# Altium PCB 十六路输出.PcbDoc (part 3 of 3)
Units mm, origin at the board's own origin, x right, y up, seen from the top; angles counter-clockwise.
Board outline 122.4 x 87.4 mm, 2 copper layers (Top Layer, Bottom Layer); 99 components, 112 nets, 383 pads, 41 vias.
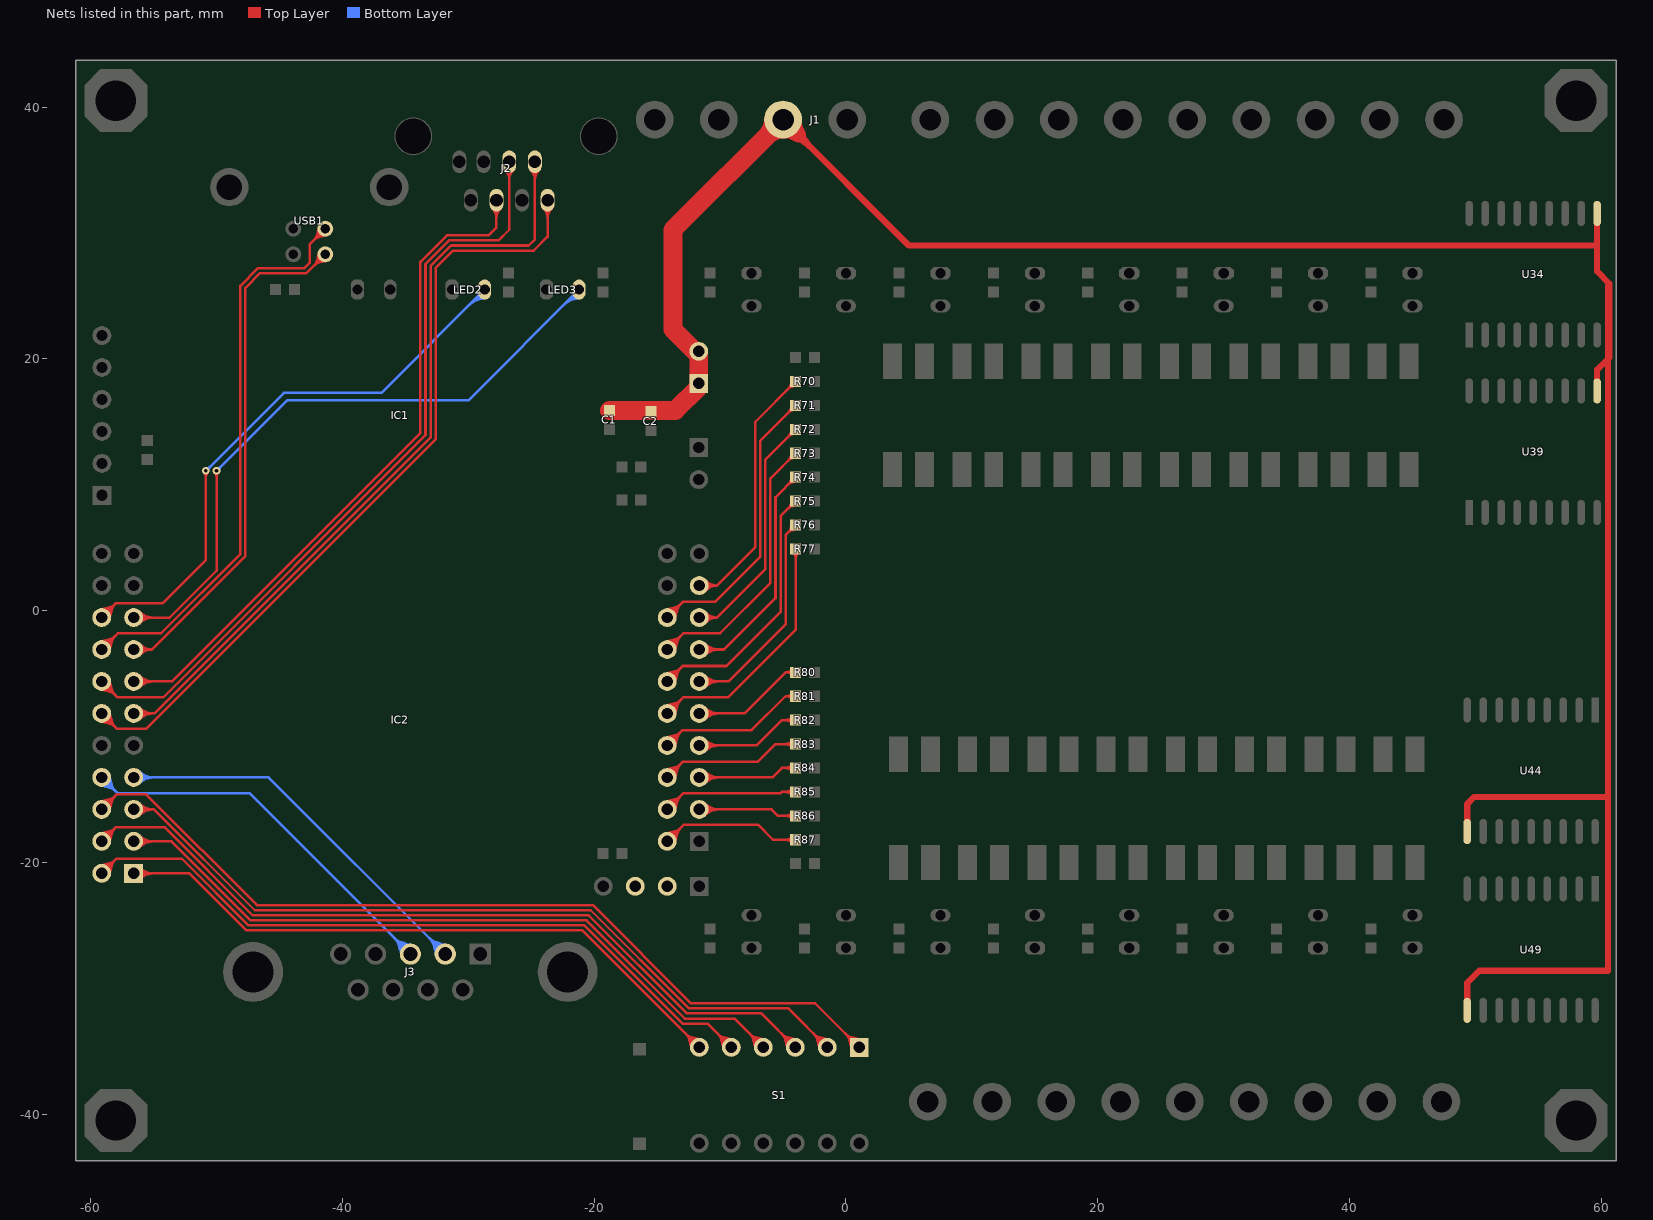
[diagram p3: the nets of this part, all layers, seen from the top]

## Via types
v1: diameter 0.6, hole 0.3, Top Layer to Bottom Layer, 41 vias

## Nets (pads, with @x,y where several pads share a name; then routed paths per layer and width w, separated by ;. In a path a pad name is that pad's centre, name@x,y a point inside that pad or via, vN(x,y) a via of type N, cw(c..) or ccw(c..) an arc to the next point about the centre after c; other vN are vias at no path point) (continued)
PA4: IC2.26 R70.1 | length 31
  Top Layer w0.2: IC2.26@-11.66,1.99 -10.251,1.99 ; R70.1@-4.43,17.865 cw(c-3.903,17.724) R70.1@-4.012,18.259 ; R70.1@-4.335,17.77 ccw(c-4.476,18.297) R70.1@-3.941,18.188 ; R70.1@-4,18.2 -7.2,15 -7.2,5.041 -10.251,1.99 ; -10.685,1.99 cw(c-10.685,2.822) -11.318,2.282 ccw(c-10.685,2.822) -10.685,1.99 ; -10.685,1.99 ccw(c-10.685,1.158) -11.318,1.698 cw(c-10.685,1.158) -10.685,1.99 ; -10.251,1.99 cw(c-10.251,3.191) -11.165,2.412 ccw(c-10.251,3.191) -10.251,1.99 ; -10.251,1.99 ccw(c-10.251,0.789) -11.165,1.568 cw(c-10.251,0.789) -10.251,1.99 ; -4.58,17.62 cw(c-4,17.039) -4,17.86 ccw(c-4,17.039) -4.58,17.62 ; -4.58,17.62 ccw(c-5.161,18.2) -4.34,18.2 cw(c-5.161,18.2) -4.58,17.62
PA5: IC2.27 R71.1 | length 40.4
  Top Layer w0.2: IC2.27@-14.543,-0.48 cw(c-13.707,-0.651) -13.928,0.173 ; IC2.27@-14.347,-0.52 cw(c-13.353,-0.723) -13.616,0.257 ; IC2.27@-14.201,-0.5 ccw(c-14.208,0.114) -13.615,-0.045 ; IC2.27@-14.2,-0.55 -12.95,0.7 -10.4,0.7 -6.8,4.3 -6.8,13.5 R71.1@-4,16.3 ; IC2.27@-14.17,-0.697 ccw(c-14.373,0.297) -13.393,0.034 ; IC2.27@-14.15,-0.551 cw(c-13.536,-0.558) -13.695,0.035 ; IC2.27@-14.13,-0.893 ccw(c-14.301,-0.057) -13.477,-0.278 ; R71.1@-4.43,15.965 cw(c-3.903,15.824) R71.1@-4.012,16.359 ; R71.1@-4.335,15.87 ccw(c-4.476,16.397) R71.1@-3.941,16.288 ; -13.432,0.218 cw(c-14.2,0.986) -14.2,-0.1 ccw(c-14.2,0.986) -13.432,0.218 ; -13.432,0.218 ccw(c-12.664,-0.55) -13.75,-0.55 cw(c-12.664,-0.55) -13.432,0.218 ; -13.09,0.56 cw(c-14.2,1.669) -14.2,0.1 ccw(c-14.2,1.669) -13.09,0.56 ; -13.09,0.56 ccw(c-11.981,-0.55) -13.55,-0.55 cw(c-11.981,-0.55) -13.09,0.56 ; -4.58,15.72 cw(c-4,15.139) -4,15.96 ccw(c-4,15.139) -4.58,15.72 ; -4.58,15.72 ccw(c-5.161,16.3) -4.34,16.3 cw(c-5.161,16.3) -4.58,15.72
PA6: IC2.28 R72.1 | length 29.8
  Top Layer w0.2: IC2.28@-11.66,-0.55 -10.25,-0.55 ; R72.1@-4.43,14.065 cw(c-3.903,13.924) R72.1@-4.012,14.459 ; R72.1@-4.335,13.97 ccw(c-4.476,14.497) R72.1@-3.941,14.388 ; R72.1@-4,14.4 -6.4,12 -6.4,3.3 -10.25,-0.55 ; -10.684,-0.55 cw(c-10.684,0.284) -11.318,-0.258 ccw(c-10.684,0.284) -10.684,-0.55 ; -10.684,-0.55 ccw(c-10.684,-1.384) -11.318,-0.842 cw(c-10.684,-1.384) -10.684,-0.55 ; -10.25,-0.55 cw(c-10.25,0.654) -11.166,-0.128 ccw(c-10.25,0.654) -10.25,-0.55 ; -10.25,-0.55 ccw(c-10.25,-1.754) -11.166,-0.972 cw(c-10.25,-1.754) -10.25,-0.55 ; -4.58,13.82 cw(c-4,13.239) -4,14.06 ccw(c-4,13.239) -4.58,13.82 ; -4.58,13.82 ccw(c-5.161,14.4) -4.34,14.4 cw(c-5.161,14.4) -4.58,13.82
PA7: IC2.29 R73.1 | length 39.4
  Top Layer w0.2: IC2.29@-14.543,-3.02 cw(c-13.707,-3.191) -13.928,-2.367 ; IC2.29@-14.347,-3.06 cw(c-13.353,-3.263) -13.616,-2.283 ; IC2.29@-14.201,-3.04 ccw(c-14.208,-2.426) -13.615,-2.585 ; IC2.29@-14.2,-3.09 -12.91,-1.8 -10,-1.8 -6,2.2 -6,10.5 R73.1@-4,12.5 ; IC2.29@-14.17,-3.237 ccw(c-14.373,-2.243) -13.393,-2.506 ; IC2.29@-14.15,-3.091 cw(c-13.536,-3.098) -13.695,-2.505 ; IC2.29@-14.13,-3.433 ccw(c-14.301,-2.597) -13.477,-2.818 ; R73.1@-4.43,12.165 cw(c-3.903,12.024) R73.1@-4.012,12.559 ; R73.1@-4.335,12.07 ccw(c-4.476,12.597) R73.1@-3.941,12.488 ; -13.432,-2.322 cw(c-14.2,-1.554) -14.2,-2.64 ccw(c-14.2,-1.554) -13.432,-2.322 ; -13.432,-2.322 ccw(c-12.664,-3.09) -13.75,-3.09 cw(c-12.664,-3.09) -13.432,-2.322 ; -13.09,-1.98 cw(c-14.2,-0.871) -14.2,-2.44 ccw(c-14.2,-0.871) -13.09,-1.98 ; -13.09,-1.98 ccw(c-11.981,-3.09) -13.55,-3.09 cw(c-11.981,-3.09) -13.09,-1.98 ; -4.58,11.92 cw(c-4,11.339) -4,12.16 ccw(c-4,11.339) -4.58,11.92 ; -4.58,11.92 ccw(c-5.161,12.5) -4.34,12.5 cw(c-5.161,12.5) -4.58,11.92
PA8: IC2.41 R87.1 | length 27.9
  Top Layer w0.2: IC2.41@-14.543,-18.26 cw(c-13.707,-18.431) -13.928,-17.607 ; IC2.41@-14.347,-18.3 cw(c-13.353,-18.503) -13.616,-17.523 ; IC2.41@-14.201,-18.28 ccw(c-14.208,-17.666) -13.615,-17.825 ; IC2.41@-14.2,-18.33 -12.87,-17 -7,-17 -5.8,-18.2 R87.1@-4,-18.2 ; IC2.41@-14.17,-18.477 ccw(c-14.373,-17.483) -13.393,-17.746 ; IC2.41@-14.15,-18.331 cw(c-13.536,-18.338) -13.695,-17.745 ; IC2.41@-14.13,-18.673 ccw(c-14.301,-17.837) -13.477,-18.058 ; -13.432,-17.562 cw(c-14.2,-16.794) -14.2,-17.88 ccw(c-14.2,-16.794) -13.432,-17.562 ; -13.432,-17.562 ccw(c-12.664,-18.33) -13.75,-18.33 cw(c-12.664,-18.33) -13.432,-17.562 ; -13.09,-17.22 cw(c-14.2,-16.111) -14.2,-17.68 ccw(c-14.2,-16.111) -13.09,-17.22 ; -13.09,-17.22 ccw(c-11.981,-18.33) -13.55,-18.33 cw(c-11.981,-18.33) -13.09,-17.22 ; -4.821,-18.2 cw(c-4.821,-19.021) -4.24,-18.44 ccw(c-4.821,-19.021) -4.821,-18.2 ; -4.821,-18.2 ccw(c-4.821,-17.379) -4.24,-17.96 cw(c-4.821,-17.379) -4.821,-18.2
PA13: IC2.14 J2.4 | length 81
  Top Layer w0.2: IC2.14@-59.463,-5.7 ccw(c-58.627,-5.529) -58.848,-6.353 ; IC2.14@-59.267,-5.66 ccw(c-58.273,-5.457) -58.536,-6.437 ; IC2.14@-59.121,-5.68 cw(c-59.128,-6.294) -58.535,-6.135 ; IC2.14@-59.12,-5.63 -57.85,-6.9 -54.231,-6.9 -33.4,13.931 -33.4,27.531 -31.531,29.4 -27.6,29.4 -26.748,30.252 J2.4@-26.748,35.648 ; IC2.14@-59.09,-5.483 cw(c-59.293,-6.477) -58.313,-6.214 ; IC2.14@-59.07,-5.629 ccw(c-58.456,-5.622) -58.615,-6.215 ; IC2.14@-59.05,-5.287 cw(c-59.221,-6.123) -58.397,-5.902 ; -58.352,-6.398 cw(c-57.584,-5.63) -58.67,-5.63 ccw(c-57.584,-5.63) -58.352,-6.398 ; -58.352,-6.398 ccw(c-59.12,-7.166) -59.12,-6.08 cw(c-59.12,-7.166) -58.352,-6.398 ; -58.01,-6.74 cw(c-56.901,-5.63) -58.47,-5.63 ccw(c-56.901,-5.63) -58.01,-6.74 ; -58.01,-6.74 ccw(c-59.12,-7.849) -59.12,-6.28 cw(c-59.12,-7.849) -58.01,-6.74 ; -26.748,34.212 cw(c-25.662,34.212) -26.43,34.98 ccw(c-25.662,34.212) -26.748,34.212 ; -26.748,34.212 ccw(c-27.834,34.212) -27.066,34.98 cw(c-27.834,34.212) -26.748,34.212 ; -26.748,34.694 cw(c-26.144,34.694) -26.571,35.121 ccw(c-26.144,34.694) -26.748,34.694 ; -26.748,34.694 ccw(c-27.352,34.694) -26.925,35.121 cw(c-27.352,34.694) -26.748,34.694
PA14: IC2.13 J2.5 | length 67.5
  Top Layer w0.2: IC2.13@-56.58,-5.63 -53.527,-5.63 -33.8,14.097 -33.8,27.697 -31.697,29.8 -28.4,29.8 -27.764,30.436 J2.5@-27.764,32.6 ; -55.494,-5.63 cw(c-55.494,-4.544) -56.262,-5.312 ccw(c-55.494,-4.544) -55.494,-5.63 ; -55.494,-5.63 ccw(c-55.494,-6.716) -56.262,-5.948 cw(c-55.494,-6.716) -55.494,-5.63 ; -55.011,-5.63 cw(c-55.011,-4.061) -56.12,-5.17 ccw(c-55.011,-4.061) -55.011,-5.63 ; -55.011,-5.63 ccw(c-55.011,-7.199) -56.12,-6.09 cw(c-55.011,-7.199) -55.011,-5.63 ; -27.764,31.164 cw(c-26.678,31.164) -27.446,31.932 ccw(c-26.678,31.164) -27.764,31.164 ; -27.764,31.164 ccw(c-28.85,31.164) -28.082,31.932 cw(c-28.85,31.164) -27.764,31.164 ; -27.764,31.646 cw(c-27.16,31.646) -27.587,32.073 ccw(c-27.16,31.646) -27.764,31.646 ; -27.764,31.646 ccw(c-28.368,31.646) -27.941,32.073 cw(c-28.368,31.646) -27.764,31.646
PB0: IC2.32 R76.1 | length 29.1
  Top Layer w0.2: IC2.32@-11.66,-5.63 -9.33,-5.63 -4.8,-1.1 -4.8,6 R76.1@-4,6.8 ; R76.1@-4.43,6.465 cw(c-3.903,6.324) R76.1@-4.012,6.859 ; R76.1@-4.335,6.37 ccw(c-4.476,6.897) R76.1@-3.941,6.788 ; -10.574,-5.63 cw(c-10.574,-4.544) -11.342,-5.312 ccw(c-10.574,-4.544) -10.574,-5.63 ; -10.574,-5.63 ccw(c-10.574,-6.716) -11.342,-5.948 cw(c-10.574,-6.716) -10.574,-5.63 ; -10.091,-5.63 cw(c-10.091,-4.061) -11.2,-5.17 ccw(c-10.091,-4.061) -10.091,-5.63 ; -10.091,-5.63 ccw(c-10.091,-7.199) -11.2,-6.09 cw(c-10.091,-7.199) -10.091,-5.63 ; -4.58,6.22 cw(c-4,5.639) -4,6.46 ccw(c-4,5.639) -4.58,6.22 ; -4.58,6.22 ccw(c-5.161,6.8) -4.34,6.8 cw(c-5.161,6.8) -4.58,6.22
PB1: IC2.33 R77.1 | length 36
  Top Layer w0.2: IC2.33@-14.543,-8.1 cw(c-13.707,-8.271) -13.928,-7.447 ; IC2.33@-14.347,-8.14 cw(c-13.353,-8.343) -13.616,-7.363 ; IC2.33@-14.201,-8.12 ccw(c-14.208,-7.506) -13.615,-7.665 ; IC2.33@-14.2,-8.17 -12.93,-6.9 -9.366,-6.9 -4,-1.534 R77.1@-4,4.9 ; IC2.33@-14.17,-8.317 ccw(c-14.373,-7.323) -13.393,-7.586 ; IC2.33@-14.15,-8.171 cw(c-13.536,-8.178) -13.695,-7.585 ; IC2.33@-14.13,-8.513 ccw(c-14.301,-7.677) -13.477,-7.898 ; -13.432,-7.402 cw(c-14.2,-6.634) -14.2,-7.72 ccw(c-14.2,-6.634) -13.432,-7.402 ; -13.432,-7.402 ccw(c-12.664,-8.17) -13.75,-8.17 cw(c-12.664,-8.17) -13.432,-7.402 ; -13.09,-7.06 cw(c-14.2,-5.951) -14.2,-7.52 ccw(c-14.2,-5.951) -13.09,-7.06 ; -13.09,-7.06 ccw(c-11.981,-8.17) -13.55,-8.17 cw(c-11.981,-8.17) -13.09,-7.06 ; -4,4.079 cw(c-3.179,4.079) -3.76,4.66 ccw(c-3.179,4.079) -4,4.079 ; -4,4.079 ccw(c-4.821,4.079) -4.24,4.66 cw(c-4.821,4.079) -4,4.079
PB8: IC2.6 S1.1 | length 95.5
  Top Layer w0.2: IC2.6@-59.463,-15.72 cw(c-58.627,-15.891) -58.848,-15.067 ; IC2.6@-59.267,-15.76 cw(c-58.273,-15.963) -58.536,-14.983 ; IC2.6@-59.121,-15.74 ccw(c-59.128,-15.126) -58.535,-15.285 ; IC2.6@-59.12,-15.79 -57.93,-14.6 -55.6,-14.6 -46.8,-23.4 -20.112,-23.4 -12.312,-31.2 -2.44,-31.2 S1.1@1.05,-34.69 ; IC2.6@-59.09,-15.937 ccw(c-59.293,-14.943) -58.313,-15.206 ; IC2.6@-59.07,-15.791 cw(c-58.456,-15.798) -58.615,-15.205 ; IC2.6@-59.05,-16.133 ccw(c-59.221,-15.297) -58.397,-15.518 ; 0.243,-34.106 ccw(c1.223,-33.843) S1.1@1.02,-34.837 ; S1.1@0.327,-34.418 ccw(c1.151,-34.197) S1.1@0.98,-35.033 ; 0.466,-33.883 cw(c0.203,-34.863) S1.1@1.197,-34.66 ; S1.1@0.778,-33.967 cw(c0.557,-34.791) S1.1@1.393,-34.62 ; -58.352,-15.022 cw(c-59.12,-14.254) -59.12,-15.34 ccw(c-59.12,-14.254) -58.352,-15.022 ; -58.352,-15.022 ccw(c-57.584,-15.79) -58.67,-15.79 cw(c-57.584,-15.79) -58.352,-15.022 ; -58.01,-14.68 cw(c-59.12,-13.571) -59.12,-15.14 ccw(c-59.12,-13.571) -58.01,-14.68 ; -58.01,-14.68 ccw(c-56.901,-15.79) -58.47,-15.79 cw(c-56.901,-15.79) -58.01,-14.68 ; -0.06,-33.58 cw(c-1.169,-34.69) 0.4,-34.69 ccw(c-1.169,-34.69) -0.06,-33.58 ; -0.06,-33.58 ccw(c1.05,-32.471) 1.05,-34.04 cw(c1.05,-32.471) -0.06,-33.58 ; 0.282,-33.922 cw(c-0.486,-34.69) 0.6,-34.69 ccw(c-0.486,-34.69) 0.282,-33.922 ; 0.282,-33.922 ccw(c1.05,-33.154) 1.05,-34.24 cw(c1.05,-33.154) 0.282,-33.922
PB13: IC2.34 R80.1 | length 19.8
  Top Layer w0.2: IC2.34@-11.66,-8.17 -8.07,-8.17 -4.8,-4.9 ; R80.1@-4,-4.9 -4.8,-4.9 ; -10.574,-8.17 cw(c-10.574,-7.084) -11.342,-7.852 ccw(c-10.574,-7.084) -10.574,-8.17 ; -10.574,-8.17 ccw(c-10.574,-9.256) -11.342,-8.488 cw(c-10.574,-9.256) -10.574,-8.17 ; -10.091,-8.17 cw(c-10.091,-6.601) -11.2,-7.71 ccw(c-10.091,-6.601) -10.091,-8.17 ; -10.091,-8.17 ccw(c-10.091,-9.739) -11.2,-8.63 cw(c-10.091,-9.739) -10.091,-8.17 ; -4.8,-4.9 cw(c-4.8,-5.671) -4.245,-5.136 ccw(c-4.8,-5.671) -4.8,-4.9 ; -4.8,-4.9 ccw(c-4.8,-4.129) -4.245,-4.664 cw(c-4.8,-4.129) -4.8,-4.9
PB14: IC2.35 R81.1 | length 28.4
  Top Layer w0.2: IC2.35@-14.543,-10.64 cw(c-13.707,-10.811) -13.928,-9.987 ; IC2.35@-14.347,-10.68 cw(c-13.353,-10.883) -13.616,-9.903 ; IC2.35@-14.201,-10.66 ccw(c-14.208,-10.046) -13.615,-10.205 ; IC2.35@-14.2,-10.71 -12.99,-9.5 -7.5,-9.5 -4.8,-6.8 ; IC2.35@-14.17,-10.857 ccw(c-14.373,-9.863) -13.393,-10.126 ; IC2.35@-14.15,-10.711 cw(c-13.536,-10.718) -13.695,-10.125 ; IC2.35@-14.13,-11.053 ccw(c-14.301,-10.217) -13.477,-10.438 ; R81.1@-4,-6.8 -4.8,-6.8 ; -13.432,-9.942 cw(c-14.2,-9.174) -14.2,-10.26 ccw(c-14.2,-9.174) -13.432,-9.942 ; -13.432,-9.942 ccw(c-12.664,-10.71) -13.75,-10.71 cw(c-12.664,-10.71) -13.432,-9.942 ; -13.09,-9.6 cw(c-14.2,-8.491) -14.2,-10.06 ccw(c-14.2,-8.491) -13.09,-9.6 ; -13.09,-9.6 ccw(c-11.981,-10.71) -13.55,-10.71 cw(c-11.981,-10.71) -13.09,-9.6 ; -4.8,-6.8 cw(c-4.8,-7.571) -4.245,-7.036 ccw(c-4.8,-7.571) -4.8,-6.8 ; -4.8,-6.8 ccw(c-4.8,-6.029) -4.245,-6.564 cw(c-4.8,-6.029) -4.8,-6.8
PB15: IC2.36 R82.1 | length 19.4
  Top Layer w0.2: IC2.36@-11.66,-10.71 -7.11,-10.71 -5.1,-8.7 R82.1@-4,-8.7 ; -10.574,-10.71 cw(c-10.574,-9.624) -11.342,-10.392 ccw(c-10.574,-9.624) -10.574,-10.71 ; -10.574,-10.71 ccw(c-10.574,-11.796) -11.342,-11.028 cw(c-10.574,-11.796) -10.574,-10.71 ; -10.091,-10.71 cw(c-10.091,-9.141) -11.2,-10.25 ccw(c-10.091,-9.141) -10.091,-10.71 ; -10.091,-10.71 ccw(c-10.091,-12.279) -11.2,-11.17 cw(c-10.091,-12.279) -10.091,-10.71 ; -4.821,-8.7 cw(c-4.821,-9.521) -4.24,-8.94 ccw(c-4.821,-9.521) -4.821,-8.7 ; -4.821,-8.7 ccw(c-4.821,-7.879) -4.24,-8.46 cw(c-4.821,-7.879) -4.821,-8.7
PC0: IC2.1 S1.6 | length 73.1
  Top Layer w0.2: IC2.1@-56.58,-20.87 -52.158,-20.87 -47.628,-25.4 -20.94,-25.4 S1.6@-11.65,-34.69 ; -12.457,-34.106 ccw(c-11.477,-33.843) S1.6@-11.68,-34.837 ; -12.373,-34.418 ccw(c-11.549,-34.197) S1.6@-11.72,-35.033 ; -12.235,-34.185 ccw(c-11.642,-34.026) S1.6@-11.649,-34.64 ; -12.234,-33.883 cw(c-12.497,-34.863) S1.6@-11.503,-34.66 ; -12.155,-34.105 cw(c-12.314,-34.698) S1.6@-11.7,-34.691 ; -11.922,-33.967 cw(c-12.143,-34.791) S1.6@-11.307,-34.62 ; -55.494,-20.87 cw(c-55.494,-19.784) -56.262,-20.552 ccw(c-55.494,-19.784) -55.494,-20.87 ; -55.494,-20.87 ccw(c-55.494,-21.956) -56.262,-21.188 cw(c-55.494,-21.956) -55.494,-20.87 ; -55.011,-20.87 cw(c-55.011,-19.301) -56.12,-20.41 ccw(c-55.011,-19.301) -55.011,-20.87 ; -55.011,-20.87 ccw(c-55.011,-22.439) -56.12,-21.33 cw(c-55.011,-22.439) -55.011,-20.87 ; -12.76,-33.58 cw(c-13.869,-34.69) -12.3,-34.69 ccw(c-13.869,-34.69) -12.76,-33.58 ; -12.76,-33.58 ccw(c-11.65,-32.471) -11.65,-34.04 cw(c-11.65,-32.471) -12.76,-33.58 ; -12.418,-33.922 cw(c-13.186,-34.69) -12.1,-34.69 ccw(c-13.186,-34.69) -12.418,-33.922 ; -12.418,-33.922 ccw(c-11.65,-33.154) -11.65,-34.24 cw(c-11.65,-33.154) -12.418,-33.922
PC1: IC2.2 S1.5 | length 84.8
  Top Layer w0.2: IC2.2@-59.463,-20.8 cw(c-58.627,-20.971) -58.848,-20.147 ; IC2.2@-59.267,-20.84 cw(c-58.273,-21.043) -58.536,-20.063 ; IC2.2@-59.121,-20.82 ccw(c-59.128,-20.206) -58.535,-20.365 ; IC2.2@-59.12,-20.87 -57.95,-19.7 -52.763,-19.7 -47.463,-25 -20.774,-25 -12.974,-32.8 -11,-32.8 S1.5@-9.11,-34.69 ; IC2.2@-59.09,-21.017 ccw(c-59.293,-20.023) -58.313,-20.286 ; IC2.2@-59.07,-20.871 cw(c-58.456,-20.878) -58.615,-20.285 ; IC2.2@-59.05,-21.213 ccw(c-59.221,-20.377) -58.397,-20.598 ; -9.917,-34.106 ccw(c-8.937,-33.843) S1.5@-9.14,-34.837 ; -9.833,-34.418 ccw(c-9.009,-34.197) S1.5@-9.18,-35.033 ; -9.695,-34.185 ccw(c-9.102,-34.026) S1.5@-9.109,-34.64 ; -9.694,-33.883 cw(c-9.957,-34.863) S1.5@-8.963,-34.66 ; -9.615,-34.105 cw(c-9.774,-34.698) S1.5@-9.16,-34.691 ; -9.382,-33.967 cw(c-9.603,-34.791) S1.5@-8.767,-34.62 ; -58.352,-20.102 cw(c-59.12,-19.334) -59.12,-20.42 ccw(c-59.12,-19.334) -58.352,-20.102 ; -58.352,-20.102 ccw(c-57.584,-20.87) -58.67,-20.87 cw(c-57.584,-20.87) -58.352,-20.102 ; -58.01,-19.76 cw(c-59.12,-18.651) -59.12,-20.22 ccw(c-59.12,-18.651) -58.01,-19.76 ; -58.01,-19.76 ccw(c-56.901,-20.87) -58.47,-20.87 cw(c-56.901,-20.87) -58.01,-19.76 ; -10.22,-33.58 cw(c-11.329,-34.69) -9.76,-34.69 ccw(c-11.329,-34.69) -10.22,-33.58 ; -10.22,-33.58 ccw(c-9.11,-32.471) -9.11,-34.04 cw(c-9.11,-32.471) -10.22,-33.58 ; -9.878,-33.922 cw(c-10.646,-34.69) -9.56,-34.69 ccw(c-10.646,-34.69) -9.878,-33.922 ; -9.878,-33.922 ccw(c-9.11,-33.154) -9.11,-34.24 cw(c-9.11,-33.154) -9.878,-33.922
PC2: IC2.3 S1.4 | length 79.2
  Top Layer w0.2: IC2.3@-56.58,-18.33 -53.567,-18.33 -47.297,-24.6 -20.609,-24.6 -12.809,-32.4 -8.86,-32.4 S1.4@-6.57,-34.69 ; -7.377,-34.106 ccw(c-6.397,-33.843) S1.4@-6.6,-34.837 ; -7.293,-34.418 ccw(c-6.469,-34.197) S1.4@-6.64,-35.033 ; -7.155,-34.185 ccw(c-6.562,-34.026) S1.4@-6.569,-34.64 ; -7.154,-33.883 cw(c-7.417,-34.863) S1.4@-6.423,-34.66 ; -7.075,-34.105 cw(c-7.234,-34.698) S1.4@-6.62,-34.691 ; -6.842,-33.967 cw(c-7.063,-34.791) S1.4@-6.227,-34.62 ; -55.494,-18.33 cw(c-55.494,-17.244) -56.262,-18.012 ccw(c-55.494,-17.244) -55.494,-18.33 ; -55.494,-18.33 ccw(c-55.494,-19.416) -56.262,-18.648 cw(c-55.494,-19.416) -55.494,-18.33 ; -55.011,-18.33 cw(c-55.011,-16.761) -56.12,-17.87 ccw(c-55.011,-16.761) -55.011,-18.33 ; -55.011,-18.33 ccw(c-55.011,-19.899) -56.12,-18.79 cw(c-55.011,-19.899) -55.011,-18.33 ; -7.68,-33.58 cw(c-8.789,-34.69) -7.22,-34.69 ccw(c-8.789,-34.69) -7.68,-33.58 ; -7.68,-33.58 ccw(c-6.57,-32.471) -6.57,-34.04 cw(c-6.57,-32.471) -7.68,-33.58 ; -7.338,-33.922 cw(c-8.106,-34.69) -7.02,-34.69 ccw(c-8.106,-34.69) -7.338,-33.922 ; -7.338,-33.922 ccw(c-6.57,-33.154) -6.57,-34.24 cw(c-6.57,-33.154) -7.338,-33.922
PC3: IC2.4 S1.3 | length 90.9
  Top Layer w0.2: IC2.4@-59.463,-18.26 cw(c-58.627,-18.431) -58.848,-17.607 ; IC2.4@-59.267,-18.3 cw(c-58.273,-18.503) -58.536,-17.523 ; IC2.4@-59.121,-18.28 ccw(c-59.128,-17.666) -58.535,-17.825 ; IC2.4@-59.12,-18.33 -57.99,-17.2 -54.131,-17.2 -47.131,-24.2 -20.443,-24.2 -12.643,-32 -6.72,-32 S1.3@-4.03,-34.69 ; IC2.4@-59.09,-18.477 ccw(c-59.293,-17.483) -58.313,-17.746 ; IC2.4@-59.07,-18.331 cw(c-58.456,-18.338) -58.615,-17.745 ; IC2.4@-59.05,-18.673 ccw(c-59.221,-17.837) -58.397,-18.058 ; -4.837,-34.106 ccw(c-3.857,-33.843) S1.3@-4.06,-34.837 ; -4.753,-34.418 ccw(c-3.929,-34.197) S1.3@-4.1,-35.033 ; -4.615,-34.185 ccw(c-4.022,-34.026) S1.3@-4.029,-34.64 ; -4.614,-33.883 cw(c-4.877,-34.863) S1.3@-3.883,-34.66 ; -4.535,-34.105 cw(c-4.694,-34.698) S1.3@-4.08,-34.691 ; -4.302,-33.967 cw(c-4.523,-34.791) S1.3@-3.687,-34.62 ; -58.352,-17.562 cw(c-59.12,-16.794) -59.12,-17.88 ccw(c-59.12,-16.794) -58.352,-17.562 ; -58.352,-17.562 ccw(c-57.584,-18.33) -58.67,-18.33 cw(c-57.584,-18.33) -58.352,-17.562 ; -58.01,-17.22 cw(c-59.12,-16.111) -59.12,-17.68 ccw(c-59.12,-16.111) -58.01,-17.22 ; -58.01,-17.22 ccw(c-56.901,-18.33) -58.47,-18.33 cw(c-56.901,-18.33) -58.01,-17.22 ; -5.14,-33.58 cw(c-6.249,-34.69) -4.68,-34.69 ccw(c-6.249,-34.69) -5.14,-33.58 ; -5.14,-33.58 ccw(c-4.03,-32.471) -4.03,-34.04 cw(c-4.03,-32.471) -5.14,-33.58 ; -4.798,-33.922 cw(c-5.566,-34.69) -4.48,-34.69 ccw(c-5.566,-34.69) -4.798,-33.922 ; -4.798,-33.922 ccw(c-4.03,-33.154) -4.03,-34.24 cw(c-4.03,-33.154) -4.798,-33.922
PC4: IC2.30 R74.1 | length 30.1
  Top Layer w0.2: IC2.30@-11.66,-3.09 -9.69,-3.09 -5.6,1 -5.6,9 R74.1@-4,10.6 ; R74.1@-4.43,10.265 cw(c-3.903,10.124) R74.1@-4.012,10.659 ; R74.1@-4.335,10.17 ccw(c-4.476,10.697) R74.1@-3.941,10.588 ; -10.574,-3.09 cw(c-10.574,-2.004) -11.342,-2.772 ccw(c-10.574,-2.004) -10.574,-3.09 ; -10.574,-3.09 ccw(c-10.574,-4.176) -11.342,-3.408 cw(c-10.574,-4.176) -10.574,-3.09 ; -10.091,-3.09 cw(c-10.091,-1.521) -11.2,-2.63 ccw(c-10.091,-1.521) -10.091,-3.09 ; -10.091,-3.09 ccw(c-10.091,-4.659) -11.2,-3.55 cw(c-10.091,-4.659) -10.091,-3.09 ; -4.58,10.02 cw(c-4,9.439) -4,10.26 ccw(c-4,9.439) -4.58,10.02 ; -4.58,10.02 ccw(c-5.161,10.6) -4.34,10.6 cw(c-5.161,10.6) -4.58,10.02
PC5: IC2.31 R75.1 | length 38.4
  Top Layer w0.2: IC2.31@-14.543,-5.56 cw(c-13.707,-5.731) -13.928,-4.907 ; IC2.31@-14.347,-5.6 cw(c-13.353,-5.803) -13.616,-4.823 ; IC2.31@-14.201,-5.58 ccw(c-14.208,-4.966) -13.615,-5.125 ; IC2.31@-14.2,-5.63 -12.97,-4.4 -9.5,-4.4 -5.2,-0.1 -5.2,7.5 R75.1@-4,8.7 ; IC2.31@-14.17,-5.777 ccw(c-14.373,-4.783) -13.393,-5.046 ; IC2.31@-14.15,-5.631 cw(c-13.536,-5.638) -13.695,-5.045 ; IC2.31@-14.13,-5.973 ccw(c-14.301,-5.137) -13.477,-5.358 ; R75.1@-4.43,8.365 cw(c-3.903,8.224) R75.1@-4.012,8.759 ; R75.1@-4.335,8.27 ccw(c-4.476,8.797) R75.1@-3.941,8.688 ; -13.432,-4.862 cw(c-14.2,-4.094) -14.2,-5.18 ccw(c-14.2,-4.094) -13.432,-4.862 ; -13.432,-4.862 ccw(c-12.664,-5.63) -13.75,-5.63 cw(c-12.664,-5.63) -13.432,-4.862 ; -13.09,-4.52 cw(c-14.2,-3.411) -14.2,-4.98 ccw(c-14.2,-3.411) -13.09,-4.52 ; -13.09,-4.52 ccw(c-11.981,-5.63) -13.55,-5.63 cw(c-11.981,-5.63) -13.09,-4.52 ; -4.58,8.12 cw(c-4,7.539) -4,8.36 ccw(c-4,7.539) -4.58,8.12 ; -4.58,8.12 ccw(c-5.161,8.7) -4.34,8.7 cw(c-5.161,8.7) -4.58,8.12
PC6: IC2.37 R83.1 | length 27.9
  Top Layer w0.2: IC2.37@-14.543,-13.18 cw(c-13.707,-13.351) -13.928,-12.527 ; IC2.37@-14.347,-13.22 cw(c-13.353,-13.423) -13.616,-12.443 ; IC2.37@-14.201,-13.2 ccw(c-14.208,-12.586) -13.615,-12.745 ; IC2.37@-14.2,-13.25 -12.95,-12 -7,-12 -5.6,-10.6 R83.1@-4,-10.6 ; IC2.37@-14.17,-13.397 ccw(c-14.373,-12.403) -13.393,-12.666 ; IC2.37@-14.15,-13.251 cw(c-13.536,-13.258) -13.695,-12.665 ; IC2.37@-14.13,-13.593 ccw(c-14.301,-12.757) -13.477,-12.978 ; -13.432,-12.482 cw(c-14.2,-11.714) -14.2,-12.8 ccw(c-14.2,-11.714) -13.432,-12.482 ; -13.432,-12.482 ccw(c-12.664,-13.25) -13.75,-13.25 cw(c-12.664,-13.25) -13.432,-12.482 ; -13.09,-12.14 cw(c-14.2,-11.031) -14.2,-12.6 ccw(c-14.2,-11.031) -13.09,-12.14 ; -13.09,-12.14 ccw(c-11.981,-13.25) -13.55,-13.25 cw(c-11.981,-13.25) -13.09,-12.14 ; -4.821,-10.6 cw(c-4.821,-11.421) -4.24,-10.84 ccw(c-4.821,-11.421) -4.821,-10.6 ; -4.821,-10.6 ccw(c-4.821,-9.779) -4.24,-10.36 cw(c-4.821,-9.779) -4.821,-10.6
PC7: IC2.38 R84.1 | length 18.9
  Top Layer w0.2: IC2.38@-11.66,-13.25 -5.85,-13.25 -5.1,-12.5 R84.1@-4,-12.5 ; -10.574,-13.25 cw(c-10.574,-12.164) -11.342,-12.932 ccw(c-10.574,-12.164) -10.574,-13.25 ; -10.574,-13.25 ccw(c-10.574,-14.336) -11.342,-13.568 cw(c-10.574,-14.336) -10.574,-13.25 ; -10.091,-13.25 cw(c-10.091,-11.681) -11.2,-12.79 ccw(c-10.091,-11.681) -10.091,-13.25 ; -10.091,-13.25 ccw(c-10.091,-14.819) -11.2,-13.71 cw(c-10.091,-14.819) -10.091,-13.25 ; -4.821,-12.5 cw(c-4.821,-13.321) -4.24,-12.74 ccw(c-4.821,-13.321) -4.821,-12.5 ; -4.821,-12.5 ccw(c-4.821,-11.679) -4.24,-12.26 cw(c-4.821,-11.679) -4.821,-12.5
PC8: IC2.39 R85.1 | length 27.4
  Top Layer w0.2: IC2.39@-14.543,-15.72 cw(c-13.707,-15.891) -13.928,-15.067 ; IC2.39@-14.347,-15.76 cw(c-13.353,-15.963) -13.616,-14.983 ; IC2.39@-14.201,-15.74 ccw(c-14.208,-15.126) -13.615,-15.285 ; IC2.39@-14.2,-15.79 -12.91,-14.5 -5.2,-14.5 -5.1,-14.4 R85.1@-4,-14.4 ; IC2.39@-14.17,-15.937 ccw(c-14.373,-14.943) -13.393,-15.206 ; IC2.39@-14.15,-15.791 cw(c-13.536,-15.798) -13.695,-15.205 ; IC2.39@-14.13,-16.133 ccw(c-14.301,-15.297) -13.477,-15.518 ; -13.432,-15.022 cw(c-14.2,-14.254) -14.2,-15.34 ccw(c-14.2,-14.254) -13.432,-15.022 ; -13.432,-15.022 ccw(c-12.664,-15.79) -13.75,-15.79 cw(c-12.664,-15.79) -13.432,-15.022 ; -13.09,-14.68 cw(c-14.2,-13.571) -14.2,-15.14 ccw(c-14.2,-13.571) -13.09,-14.68 ; -13.09,-14.68 ccw(c-11.981,-15.79) -13.55,-15.79 cw(c-11.981,-15.79) -13.09,-14.68 ; -4.821,-14.4 cw(c-4.821,-15.221) -4.24,-14.64 ccw(c-4.821,-15.221) -4.821,-14.4 ; -4.821,-14.4 ccw(c-4.821,-13.579) -4.24,-14.16 cw(c-4.821,-13.579) -4.821,-14.4
PC9: IC2.40 R86.1 | length 18.8
  Top Layer w0.2: IC2.40@-11.66,-15.79 -5.91,-15.79 -5.4,-16.3 R86.1@-4,-16.3 ; -10.574,-15.79 cw(c-10.574,-14.704) -11.342,-15.472 ccw(c-10.574,-14.704) -10.574,-15.79 ; -10.574,-15.79 ccw(c-10.574,-16.876) -11.342,-16.108 cw(c-10.574,-16.876) -10.574,-15.79 ; -10.091,-15.79 cw(c-10.091,-14.221) -11.2,-15.33 ccw(c-10.091,-14.221) -10.091,-15.79 ; -10.091,-15.79 ccw(c-10.091,-17.359) -11.2,-16.25 cw(c-10.091,-17.359) -10.091,-15.79 ; -4.821,-16.3 cw(c-4.821,-17.121) -4.24,-16.54 ccw(c-4.821,-17.121) -4.821,-16.3 ; -4.821,-16.3 ccw(c-4.821,-15.479) -4.24,-16.06 cw(c-4.821,-15.479) -4.821,-16.3
PC10: IC2.45
PC11: IC2.44
PC12: IC2.17 LED3.K | length 65.3
  Top Layer w0.2: IC2.17@-56.58,-0.55 -53.716,-0.55 -50,3.166 v1(-50,11.1) ; -55.494,-0.55 cw(c-55.494,0.536) -56.262,-0.232 ccw(c-55.494,0.536) -55.494,-0.55 ; -55.494,-0.55 ccw(c-55.494,-1.636) -56.262,-0.868 cw(c-55.494,-1.636) -55.494,-0.55 ; -55.011,-0.55 cw(c-55.011,1.019) -56.12,-0.09 ccw(c-55.011,1.019) -55.011,-0.55 ; -55.011,-0.55 ccw(c-55.011,-2.119) -56.12,-1.01 cw(c-55.011,-2.119) -55.011,-0.55 ; -50,10.617 cw(c-49.517,10.617) -49.859,10.959 ccw(c-49.517,10.617) -50,10.617 ; -50,10.617 ccw(c-50.483,10.617) -50.141,10.959 cw(c-50.483,10.617) -50,10.617
  Bottom Layer w0.2: v1(-50,11.1) -44.4,16.7 -30,16.7 LED3.K@-21.2,25.5 ; -22.395,24.305 cw(c-21.2,23.11) LED3.K@-21.2,24.8 ; -22.054,24.646 cw(c-21.2,23.793) LED3.K@-21.2,25 ; -21.712,24.988 cw(c-21.2,24.475) LED3.K@-21.2,25.2 ; -21.69,25.01 ccw(c-21.888,25.208) LED3.K@-21.608,25.208 ; -49.659,11.441 cw(c-50,11.783) -50,11.3 ccw(c-50,11.783) -49.659,11.441 ; -49.659,11.441 ccw(c-49.317,11.1) -49.8,11.1 cw(c-49.317,11.1) -49.659,11.441
PC13: IC2.5 S1.2 | length 85.3
  Top Layer w0.2: IC2.5@-56.58,-15.79 -54.976,-15.79 -46.966,-23.8 -20.277,-23.8 -12.477,-31.6 -4.58,-31.6 S1.2@-1.49,-34.69 ; -2.297,-34.106 ccw(c-1.317,-33.843) S1.2@-1.52,-34.837 ; -2.213,-34.418 ccw(c-1.389,-34.197) S1.2@-1.56,-35.033 ; -2.075,-34.185 ccw(c-1.482,-34.026) S1.2@-1.489,-34.64 ; -2.074,-33.883 cw(c-2.337,-34.863) S1.2@-1.343,-34.66 ; -1.995,-34.105 cw(c-2.154,-34.698) S1.2@-1.54,-34.691 ; -1.762,-33.967 cw(c-1.983,-34.791) S1.2@-1.147,-34.62 ; -55.494,-15.79 cw(c-55.494,-14.704) -56.262,-15.472 ccw(c-55.494,-14.704) -55.494,-15.79 ; -55.494,-15.79 ccw(c-55.494,-16.876) -56.262,-16.108 cw(c-55.494,-16.876) -55.494,-15.79 ; -55.011,-15.79 cw(c-55.011,-14.221) -56.12,-15.33 ccw(c-55.011,-14.221) -55.011,-15.79 ; -55.011,-15.79 ccw(c-55.011,-17.359) -56.12,-16.25 cw(c-55.011,-17.359) -55.011,-15.79 ; -2.6,-33.58 cw(c-3.709,-34.69) -2.14,-34.69 ccw(c-3.709,-34.69) -2.6,-33.58 ; -2.6,-33.58 ccw(c-1.49,-32.471) -1.49,-34.04 cw(c-1.49,-32.471) -2.6,-33.58 ; -2.258,-33.922 cw(c-3.026,-34.69) -1.94,-34.69 ccw(c-3.026,-34.69) -2.258,-33.922 ; -2.258,-33.922 ccw(c-1.49,-33.154) -1.49,-34.24 cw(c-1.49,-33.154) -2.258,-33.922
PD2: IC2.18 LED2.K | length 65.5
  Top Layer w0.2: IC2.18@-59.463,-0.48 cw(c-58.627,-0.651) -58.848,0.173 ; IC2.18@-59.267,-0.52 cw(c-58.273,-0.723) -58.536,0.257 ; IC2.18@-59.121,-0.5 ccw(c-59.128,0.114) -58.535,-0.045 ; IC2.18@-59.12,-0.55 -57.97,0.6 -54.266,0.6 -50.849,4.017 v1(-50.849,11.1) ; IC2.18@-59.09,-0.697 ccw(c-59.293,0.297) -58.313,0.034 ; IC2.18@-59.07,-0.551 cw(c-58.456,-0.558) -58.615,0.035 ; IC2.18@-59.05,-0.893 ccw(c-59.221,-0.057) -58.397,-0.278 ; -58.352,0.218 cw(c-59.12,0.986) -59.12,-0.1 ccw(c-59.12,0.986) -58.352,0.218 ; -58.352,0.218 ccw(c-57.584,-0.55) -58.67,-0.55 cw(c-57.584,-0.55) -58.352,0.218 ; -58.01,0.56 cw(c-59.12,1.669) -59.12,0.1 ccw(c-59.12,1.669) -58.01,0.56 ; -58.01,0.56 ccw(c-56.901,-0.55) -58.47,-0.55 cw(c-56.901,-0.55) -58.01,0.56 ; -50.849,10.617 cw(c-50.366,10.617) -50.707,10.959 ccw(c-50.366,10.617) -50.849,10.617 ; -50.849,10.617 ccw(c-51.331,10.617) -50.99,10.959 cw(c-51.331,10.617) -50.849,10.617
  Bottom Layer w0.2: v1(-50.849,11.1) -44.649,17.3 -36.9,17.3 LED2.K@-28.7,25.5 ; -29.895,24.305 cw(c-28.7,23.11) LED2.K@-28.7,24.8 ; -29.554,24.646 cw(c-28.7,23.793) LED2.K@-28.7,25 ; -29.212,24.988 cw(c-28.7,24.475) LED2.K@-28.7,25.2 ; -29.19,25.01 ccw(c-29.388,25.208) LED2.K@-29.108,25.208 ; -50.507,11.441 cw(c-50.849,11.783) -50.849,11.3 ccw(c-50.849,11.783) -50.507,11.441 ; -50.507,11.441 ccw(c-50.166,11.1) -50.649,11.1 cw(c-50.166,11.1) -50.507,11.441
RJ45_RX: IC2.11 J2.2 | length 75.2
  Top Layer w0.2: IC2.11@-56.58,-8.17 -54.936,-8.17 -33,13.766 -33,27.366 -31.366,29 -25.2,29 -24.716,29.484 J2.2@-24.716,35.648 ; -55.494,-8.17 cw(c-55.494,-7.084) -56.262,-7.852 ccw(c-55.494,-7.084) -55.494,-8.17 ; -55.494,-8.17 ccw(c-55.494,-9.256) -56.262,-8.488 cw(c-55.494,-9.256) -55.494,-8.17 ; -55.011,-8.17 cw(c-55.011,-6.601) -56.12,-7.71 ccw(c-55.011,-6.601) -55.011,-8.17 ; -55.011,-8.17 ccw(c-55.011,-9.739) -56.12,-8.63 cw(c-55.011,-9.739) -55.011,-8.17 ; -24.716,34.212 cw(c-23.63,34.212) -24.398,34.98 ccw(c-23.63,34.212) -24.716,34.212 ; -24.716,34.212 ccw(c-25.802,34.212) -25.034,34.98 cw(c-25.802,34.212) -24.716,34.212 ; -24.716,34.694 cw(c-24.112,34.694) -24.539,35.121 ccw(c-24.112,34.694) -24.716,34.694 ; -24.716,34.694 ccw(c-25.32,34.694) -24.893,35.121 cw(c-25.32,34.694) -24.716,34.694
RJ45_TX: IC2.12 J2.1 | length 82.4
  Top Layer w0.2: IC2.12@-59.463,-8.24 ccw(c-58.627,-8.069) -58.848,-8.893 ; IC2.12@-59.267,-8.2 ccw(c-58.273,-7.997) -58.536,-8.977 ; IC2.12@-59.121,-8.22 cw(c-59.128,-8.834) -58.535,-8.675 ; IC2.12@-59.12,-8.17 -57.89,-9.4 -55.6,-9.4 -32.6,13.6 -32.6,27.2 -31.2,28.6 -24.8,28.6 -23.7,29.7 J2.1@-23.7,32.6 ; IC2.12@-59.09,-8.023 cw(c-59.293,-9.017) -58.313,-8.754 ; IC2.12@-59.07,-8.169 ccw(c-58.456,-8.162) -58.615,-8.755 ; IC2.12@-59.05,-7.827 cw(c-59.221,-8.663) -58.397,-8.442 ; -58.352,-8.938 cw(c-57.584,-8.17) -58.67,-8.17 ccw(c-57.584,-8.17) -58.352,-8.938 ; -58.352,-8.938 ccw(c-59.12,-9.706) -59.12,-8.62 cw(c-59.12,-9.706) -58.352,-8.938 ; -58.01,-9.28 cw(c-56.901,-8.17) -58.47,-8.17 ccw(c-56.901,-8.17) -58.01,-9.28 ; -58.01,-9.28 ccw(c-59.12,-10.389) -59.12,-8.82 cw(c-59.12,-10.389) -58.01,-9.28 ; -23.7,31.164 cw(c-22.614,31.164) -23.382,31.932 ccw(c-22.614,31.164) -23.7,31.164 ; -23.7,31.164 ccw(c-24.786,31.164) -24.018,31.932 cw(c-24.786,31.164) -23.7,31.164 ; -23.7,31.646 cw(c-23.096,31.646) -23.523,32.073 ccw(c-23.096,31.646) -23.7,31.646 ; -23.7,31.646 ccw(c-24.304,31.646) -23.877,32.073 cw(c-24.304,31.646) -23.7,31.646
RS232_RX: IC2.7 J3.2 | length 53.9
  Bottom Layer w0.2: IC2.7@-56.58,-13.25 -45.86,-13.25 J3.2@-31.83,-27.28 ; -32.803,-26.427 ccw(c-31.589,-26.102) J3.2@-31.841,-27.334 ; -32.72,-26.74 ccw(c-31.661,-26.456) J3.2@-31.881,-27.53 ; -32.683,-26.307 cw(c-33.008,-27.521) J3.2@-31.776,-27.269 ; -32.37,-26.39 cw(c-32.654,-27.449) J3.2@-31.58,-27.229 ; -55.494,-13.25 cw(c-55.494,-12.164) -56.262,-12.932 ccw(c-55.494,-12.164) -55.494,-13.25 ; -55.494,-13.25 ccw(c-55.494,-14.336) -56.262,-13.568 cw(c-55.494,-14.336) -55.494,-13.25 ; -55.011,-13.25 cw(c-55.011,-11.681) -56.12,-12.79 ccw(c-55.011,-11.681) -55.011,-13.25 ; -55.011,-13.25 ccw(c-55.011,-14.819) -56.12,-13.71 cw(c-55.011,-14.819) -55.011,-13.25 ; -33.102,-26.008 cw(c-34.374,-27.28) -32.575,-27.28 ccw(c-34.374,-27.28) -33.102,-26.008 ; -33.102,-26.008 ccw(c-31.83,-24.736) -31.83,-26.535 cw(c-31.83,-24.736) -33.102,-26.008 ; -32.76,-26.35 cw(c-33.691,-27.28) -32.375,-27.28 ccw(c-33.691,-27.28) -32.76,-26.35 ; -32.76,-26.35 ccw(c-31.83,-25.419) -31.83,-26.735 cw(c-31.83,-25.419) -32.76,-26.35
RS232_TX: IC2.8 J3.3 | length 57.8
  Bottom Layer w0.2: IC2.8@-59.463,-13.32 ccw(c-58.627,-13.149) -58.848,-13.973 ; IC2.8@-59.267,-13.28 ccw(c-58.273,-13.077) -58.536,-14.057 ; IC2.8@-59.12,-13.25 -57.87,-14.5 -47.38,-14.5 J3.3@-34.6,-27.28 ; IC2.8@-59.09,-13.103 cw(c-59.293,-14.097) -58.313,-13.834 ; IC2.8@-59.05,-12.907 cw(c-59.221,-13.743) -58.397,-13.522 ; -35.573,-26.427 ccw(c-34.359,-26.102) J3.3@-34.611,-27.334 ; -35.49,-26.74 ccw(c-34.431,-26.456) J3.3@-34.651,-27.53 ; -35.453,-26.307 cw(c-35.778,-27.521) J3.3@-34.546,-27.269 ; -35.14,-26.39 cw(c-35.424,-27.449) J3.3@-34.35,-27.229 ; -58.352,-14.018 cw(c-57.584,-13.25) -58.67,-13.25 ccw(c-57.584,-13.25) -58.352,-14.018 ; -58.352,-14.018 ccw(c-59.12,-14.786) -59.12,-13.7 cw(c-59.12,-14.786) -58.352,-14.018 ; -58.01,-14.36 cw(c-56.901,-13.25) -58.47,-13.25 ccw(c-56.901,-13.25) -58.01,-14.36 ; -58.01,-14.36 ccw(c-59.12,-15.469) -59.12,-13.9 cw(c-59.12,-15.469) -58.01,-14.36 ; -35.872,-26.008 cw(c-37.144,-27.28) -35.345,-27.28 ccw(c-37.144,-27.28) -35.872,-26.008 ; -35.872,-26.008 ccw(c-34.6,-24.736) -34.6,-26.535 cw(c-34.6,-24.736) -35.872,-26.008 ; -35.53,-26.35 cw(c-36.461,-27.28) -35.145,-27.28 ccw(c-36.461,-27.28) -35.53,-26.35 ; -35.53,-26.35 ccw(c-34.6,-25.419) -34.6,-26.735 cw(c-34.6,-25.419) -35.53,-26.35
USB_D+: IC2.16 USB1.3 | length 69.2
  Top Layer w0.2: IC2.16@-59.463,-3.02 cw(c-58.627,-3.191) -58.848,-2.367 ; IC2.16@-59.267,-3.06 cw(c-58.273,-3.263) -58.536,-2.283 ; IC2.16@-59.121,-3.04 ccw(c-59.128,-2.426) -58.535,-2.585 ; IC2.16@-59.12,-3.09 -57.83,-1.8 -54.4,-1.8 -48.1,4.5 -48.1,25.8 -46.7,27.2 -43.026,27.2 -42.6,27.626 -42.6,29.092 USB1.3@-41.36,30.332 ; IC2.16@-59.09,-3.237 ccw(c-59.293,-2.243) -58.313,-2.506 ; IC2.16@-59.07,-3.091 cw(c-58.456,-3.098) -58.615,-2.505 ; IC2.16@-59.05,-3.433 ccw(c-59.221,-2.597) -58.397,-2.818 ; -42.048,29.76 cw(c-41.196,29.531) USB1.3@-41.373,30.396 ; -41.965,30.072 cw(c-41.269,29.886) USB1.3@-41.413,30.592 ; -41.932,29.644 ccw(c-42.161,30.496) USB1.3@-41.296,30.319 ; -41.62,29.727 ccw(c-41.806,30.423) USB1.3@-41.1,30.279 ; -58.352,-2.322 cw(c-59.12,-1.554) -59.12,-2.64 ccw(c-59.12,-1.554) -58.352,-2.322 ; -58.352,-2.322 ccw(c-57.584,-3.09) -58.67,-3.09 cw(c-57.584,-3.09) -58.352,-2.322 ; -58.01,-1.98 cw(c-59.12,-0.871) -59.12,-2.44 ccw(c-59.12,-0.871) -58.01,-1.98 ; -58.01,-1.98 ccw(c-56.901,-3.09) -58.47,-3.09 cw(c-56.901,-3.09) -58.01,-1.98 ; -42.273,29.419 cw(c-41.36,28.505) -41.36,29.797 ccw(c-41.36,28.505) -42.273,29.419 ; -42.273,29.419 ccw(c-43.187,30.332) -41.895,30.332 cw(c-43.187,30.332) -42.273,29.419 ; -41.932,29.76 cw(c-41.36,29.188) -41.36,29.997 ccw(c-41.36,29.188) -41.932,29.76 ; -41.932,29.76 ccw(c-42.504,30.332) -41.695,30.332 cw(c-42.504,30.332) -41.932,29.76
USB_D-: IC2.15 USB1.2 | length 58.3
  Top Layer w0.2: IC2.15@-56.58,-3.09 -55.124,-3.09 ; -42.048,27.728 cw(c-41.196,27.499) USB1.2@-41.373,28.364 ; -41.965,28.04 cw(c-41.269,27.854) USB1.2@-41.413,28.56 ; -41.932,27.612 ccw(c-42.161,28.464) USB1.2@-41.296,28.287 ; -41.62,27.695 ccw(c-41.806,28.391) USB1.2@-41.1,28.247 ; USB1.2@-41.36,28.3 -42.86,26.8 -46.534,26.8 -47.7,25.634 -47.7,4.334 -55.124,-3.09 ; -55.572,-3.09 cw(c-55.572,-2.187) -56.245,-2.79 ccw(c-55.572,-2.187) -55.572,-3.09 ; -55.572,-3.09 ccw(c-55.572,-3.993) -56.245,-3.39 cw(c-55.572,-3.993) -55.572,-3.09 ; -55.124,-3.09 cw(c-55.124,-1.785) -56.096,-2.656 ccw(c-55.124,-1.785) -55.124,-3.09 ; -55.124,-3.09 ccw(c-55.124,-4.395) -56.096,-3.524 cw(c-55.124,-4.395) -55.124,-3.09 ; -42.273,27.387 cw(c-41.36,26.473) -41.36,27.765 ccw(c-41.36,26.473) -42.273,27.387 ; -42.273,27.387 ccw(c-43.187,28.3) -41.895,28.3 cw(c-43.187,28.3) -42.273,27.387 ; -41.932,27.728 cw(c-41.36,27.156) -41.36,27.965 ccw(c-41.36,27.156) -41.932,27.728 ; -41.932,27.728 ccw(c-42.504,28.3) -41.695,28.3 cw(c-42.504,28.3) -41.932,27.728
VCC: C1.1 C2.1 IC1.1 J1.2 U34.10 U39.10 U44.10 U49.10 | length 224.3
  Top Layer w0.5: J1.2@-5.245,38.95 ccw(c-3.303,39.348) -3.816,37.433 ; J1.2@-5,39 5,29 59.66,29 ; J1.2@-4.95,39.245 cw(c-5.348,37.303) -3.433,37.816 ; U49.10@49.34,-31.75 49.34,-29.56 50.3,-28.6 60.523,-28.6 60.523,-14.8 ; U44.10@49.34,-17.55 49.34,-15.36 49.9,-14.8 60.523,-14.8 ; U39.10@59.66,17.45 59.66,19.137 60.623,20.1 60.623,25.977 59.66,26.94 59.66,29 ; U34.10@59.66,31.55 59.66,29 ; 60.523,25.777 60.523,-14.8 ; -3.72,37.72 cw(c-2.439,39) -4.25,39 ccw(c-2.439,39) -3.72,37.72 ; -3.72,37.72 ccw(c-5,36.439) -5,38.25 cw(c-5,36.439) -3.72,37.72 ; -2.866,36.866 cw(c-0.732,39) -3.75,39 ccw(c-0.732,39) -2.866,36.866 ; -2.866,36.866 ccw(c-5,34.732) -5,37.75 cw(c-5,34.732) -2.866,36.866
  Top Layer w1.5: C1.1@-18.8,15.9 -13.55,15.9 -11.7,17.75 -11.7,20.29 -13.755,22.345 -13.755,30.245 J1.2@-5,39 ; -6.28,37.72 cw(c-5,36.439) -5,38.25 ccw(c-5,36.439) -6.28,37.72 ; -6.28,37.72 ccw(c-7.561,39) -5.75,39 cw(c-7.561,39) -6.28,37.72
pads on no net: IC1.5 J3.1 J3.4 J3.6 J3.7 J3.8 J3.9

## Polygon pours and split planes (outlines as drawn)
GND on Top Layer "Bottom Layer-No Net" (solid, remove dead copper, pour order 4): -62,44.5 -62,-44.5 61.8,-44.5 61.8,44.5
GND on Bottom Layer "Bottom Layer-No Net" (solid, remove dead copper, pour order 3): -62,44.5 -62,-44.5 61.8,-44.5 61.8,44.5

## Keep-outs
Keep-Out Layer:
  the board outline again, w0.254

## Silkscreen, mask and mechanical layers (free items; w line width, h text height)
Top Overlay:
  lines w0.254: -61.2,-35 -50,-35 -50,-43.7 ; -61.2,35 -50,35 -50,43.7 ; 50,-43.7 50,-35 61.2,-35 ; 50,43.7 50,35 61.2,35
  text "月无声® YWS®" at 9.8,3.3 h5
  text "阿波罗工业控制器" at 9,-1.4 h5
  text "十六路输出  V1.1" at 9.1,-6.2 h5
Bottom Overlay:
  text "东莞市月无声电子" at -20.9,-37.3 h5
  text "www.yuewusheng.com" at -18.5,-40.8 h4

## Dimensions
-61.2,43.7 to -61.2,-43.7 on Top Overlay
-61.2,-43.7 to 61.2,-43.7 on Top Overlay
-50,43.7 to 50,43.7 on Top Overlay
-61.2,35 to -61.2,-35 on Top Overlay

## Text inside footprints (layer, text, board x,y; h text height)
J3: Top Overlay "6" at -29.8,-31.8 h1.5 r180; Top Overlay "9" at -38.3,-31.8 h1.5 r180; Top Overlay "5" at -40,-29 h1.5 r180; Top Overlay "1" at -28.6,-29.2 h1.5 r180
USB1: Top Overlay "1" at -45.17,27.792 h1.27 r90; Top Overlay "4" at -45.17,30.332 h1.27 r90